# Altium PCB creative2017-李秋键.PcbDoc
Units mil, origin at the board's own origin, x right, y up, seen from the top; angles counter-clockwise.
Board outline 6000 x 4000 mil, 2 copper layers (Top Layer, Bottom Layer); 54 components, 95 nets, 310 pads, 81 vias.
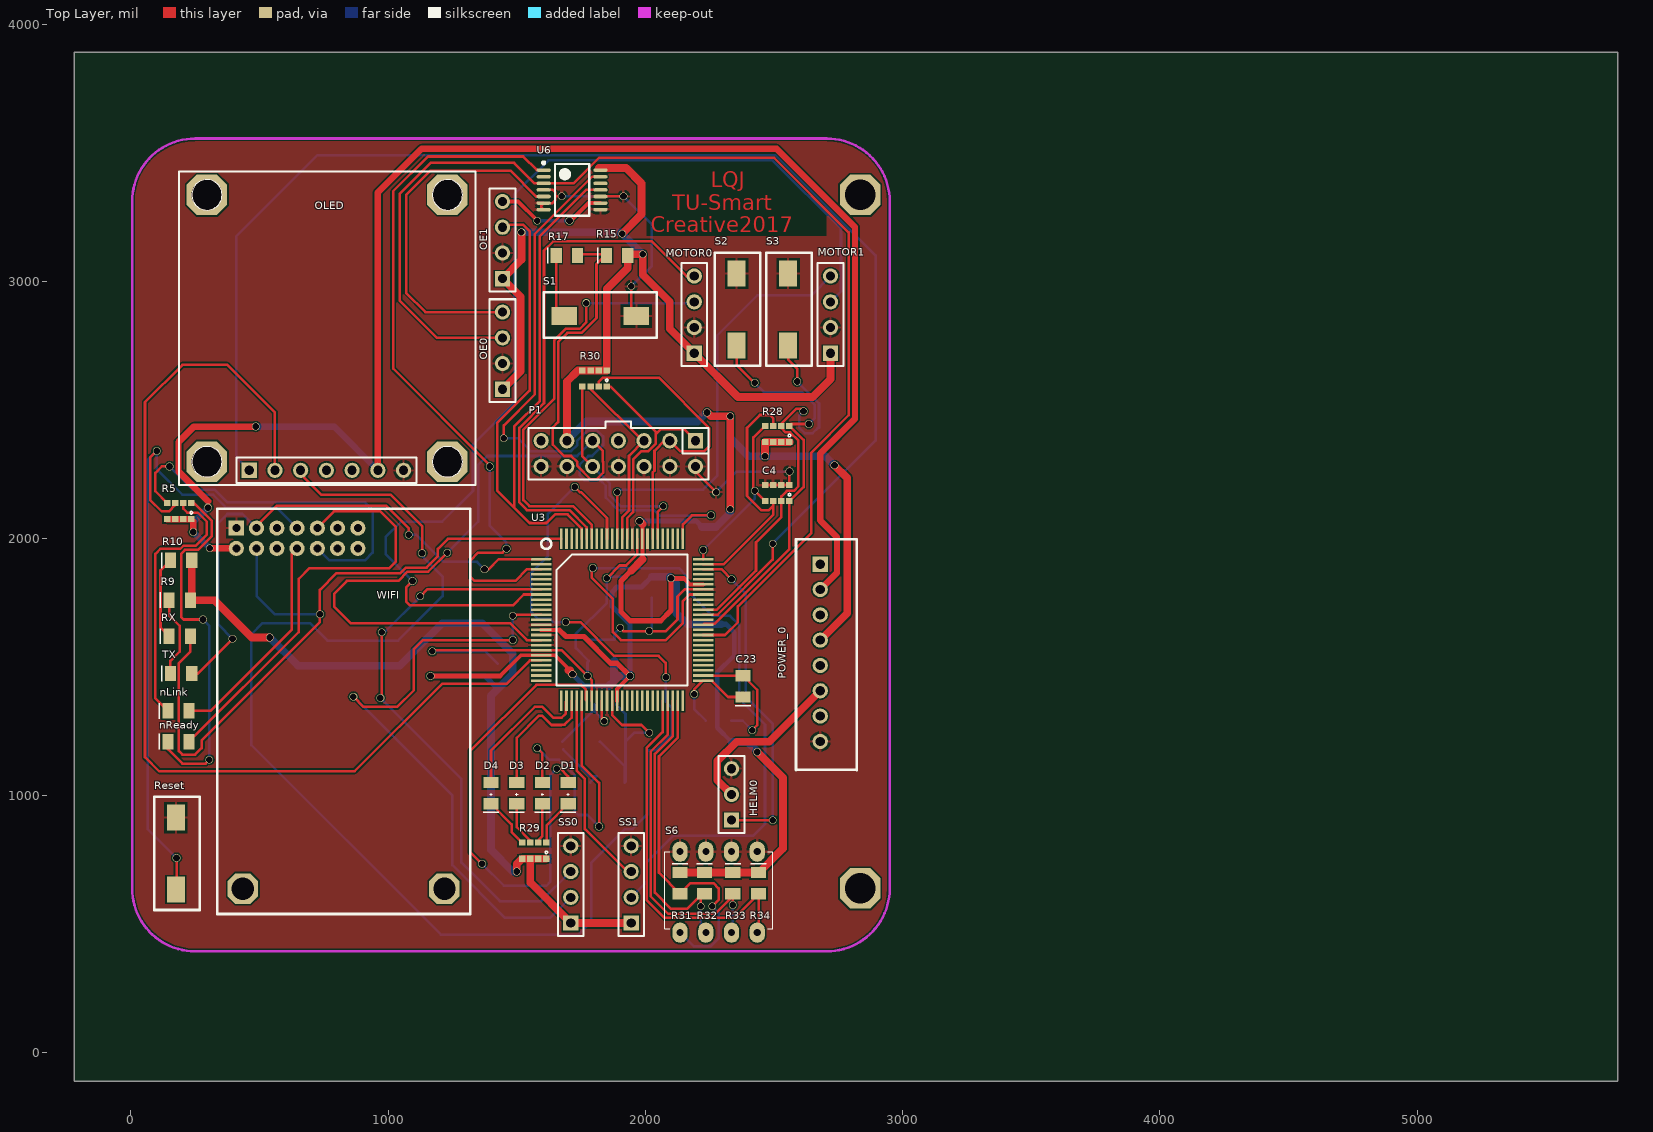
[diagram p0: Top Layer view]
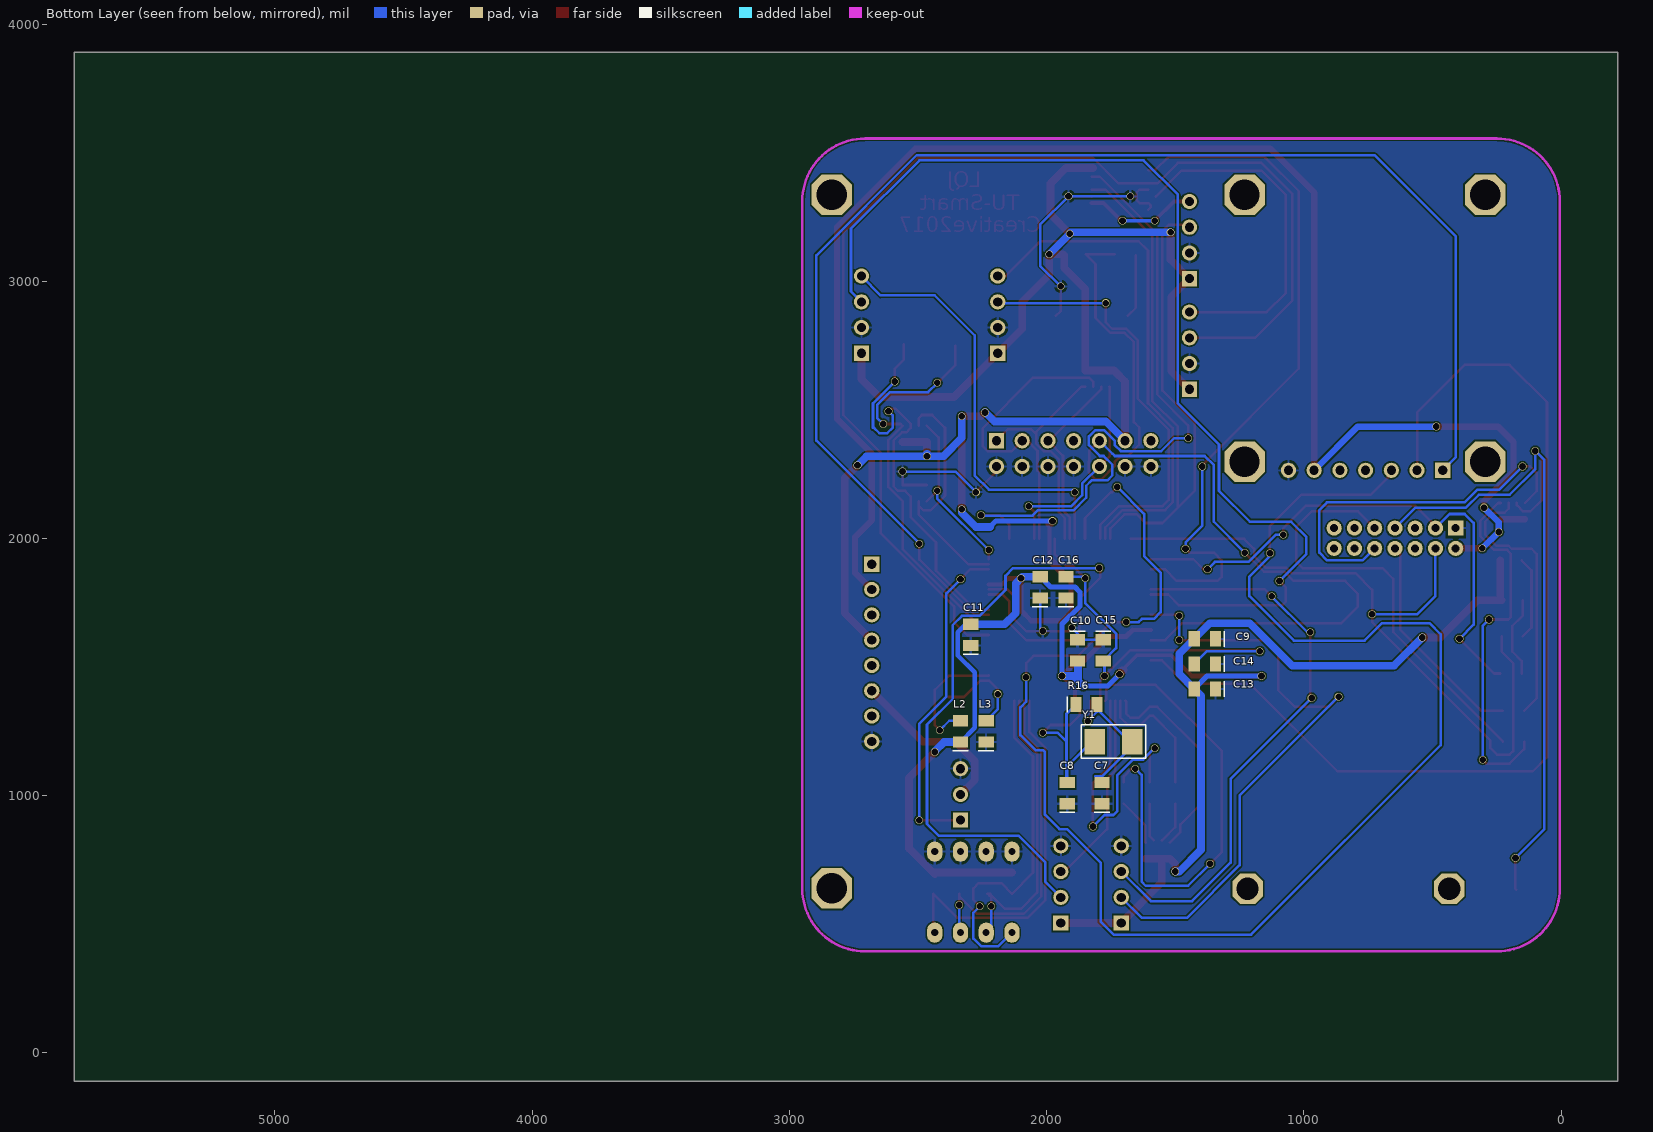
[diagram p1: Bottom Layer view, seen from below]

## Layer stack, top to bottom
Top Layer: signal copper 1.4
Dielectric: dielectric 12.6, FR-4, Dk 4.8
Bottom Layer: signal copper 1.4

## Board outline
-220,-110 5780,-110 5780,3890 -220,3890

## Design rules (kind name [scope] priority, off if disabled: settings)
Clearance [All] p1: gap=6
ComponentClearance [All] p1 off: gap=10 collisioncheckmode=3 verticalgap=10 showdistances=FALSE
HoleSize [All] p1: absolutevalues=TRUE maxlimit=200 minlimit=1 maxpercent=80.000 minpercent=20.000
MinimumSolderMaskSliver [All] p1: minsoldermaskwidth=1
PolygonConnect [All] p1: connectstyle=Relief reliefconductorwidth=10 reliefentries=4 polygonreliefangle="90 Angle" airgapwidth=10
RoutingVias [All] p1: holewidth=26 width=30 viastyle="Through Hole" minholewidth=26 minwidth=30 maxholewidth=26 maxwidth=30
SilkToSilkClearance [All] p1: silktosilkclearance=1
SilkToSolderMaskClearance [IsPad] p1: minsilkscreentomaskgap=0 clearancetoexposedcopper=TRUE
SolderMaskExpansion [All] p1: expansion=4
Width [All] p1: maxlimit=35 minlimit=10 preferedwidth=15
23 further rules are at their usual default settings.

## Classes and differential pairs
component class WiFi: nLink nReady R5 R9 R10 Reset RX TX WIFI
component class Total: C4 C7 C8 C9 C10 C11 C12 C13 C14 C15 C16 C23 D1 D2 D3 D4 HELM0 L2 L3 MOTOR0 MOTOR1 OE0 OE1 OLED P1 POWER_0 R15 R16 R17 R28 R29 R30 R31 R32 R33 R34 S1 S2 S3 S6 SS0 SS1 U3 U6 Y1

## Components (designator, comment, footprint, x,y, rotation, side; value= is the part's Value field where it differs from the comment)
C4 "Cap x4" 8P4R-0603 2560,2145 r180 top
C7 "Cap" "0805 2" 1785,1010 r90 bottom
C8 "Cap" "0805 2" 1920,1010 r90 bottom
C9 "Cap" "0805 2" 1385,1610 r0 bottom
C10 "Cap" "0805 2" 1880,1565 r270 bottom
C11 "Cap" "0805 2" 2295,1625 r90 bottom
C12 "Cap" "0805 2" 2025,1810 r90 bottom
C13 "Cap" "0805 2" 1385,1415 r0 bottom
C14 "Cap" "0805 2" 1385,1512.5 r0 bottom
C15 "Cap" "0805 2" 1780,1565 r270 bottom
C16 "Cap" "0805 2" 1925,1810 r90 bottom
C23 "Cap" "0805 2" 2380,1425 r90 top
D1 "LED" "0805 Pol 3" 1700,1010 r90 top
D2 "LED" "0805 Pol 3" 1600,1010 r90 top
D3 "LED" "0805 Pol 3" 1500,1010 r90 top
D4 "LED" "0805 Pol 3" 1400,1010 r90 top
HELM0 "Header 3" HDR1X3 2335,905 r90 top
L2 "Bead" "0805 2" 2335,1250 r90 bottom
L3 "Bead" "0805 2" 2235,1250 r90 bottom
MOTOR0 "Header 4" HDR1X4 2190,2720 r90 top
MOTOR1 "Header 4" HDR1X4 2720,2720 r90 top
nLink "LED" "0805 2" 185,1330 r0 top
nReady "LED" "0805 2" 185,1210 r0 top
OE0 "Header 4" HDR1X4 1445,2580 r90 top
OE1 "Header 4" HDR1X4 1445,3010 r90 top
OLED "Header 7X1" OLED-chiusir 1340,3430 r180 top
P1 "Header 7X2" "Header 2X7" 2195,2380 r180 top
POWER_0 "Header 8" XH2.54_8 2680,1900 r270 top
R5 "R x4" 8P4R-0603 235,2075 r180 top
R9 "Res" "0805 2" 190,1760 r0 top
R10 "Res" "0805 2" 195,1915 r0 top
R15 "Res" "0805 2" 1890,3100 r0 top
R16 "Res" "0805 2" 1845,1355 r180 bottom
R17 "Res" "0805 2" 1695,3100 r0 top
R28 "R x4" 8P4R-0603 2560,2375 r180 top
R29 "R x4" 8P4R-0603 1615,755 r180 top
R30 "R x4" 8P4R-0603 1850,2590 r180 top
R31 "Res2" "0805 2" 2135,660 r270 top
R32 "Res2" "0805 2" 2230,660 r270 top
R33 "Res2" "0805 2" 2340,660 r270 top
R34 "Res2" "0805 2" 2440,660 r270 top
Reset "Switch-1" 轻触按键 175,635 r90 top
RX "LED" "0805 2" 190,1620 r0 top
S1 "Switch-1" 轻触按键 1965,2865 r180 top
S2 "Switch-1" 轻触按键 2355,2750 r90 top
S3 "Switch-1" 轻触按键 2555,2750 r90 top
S6 "SW-DIP4" Switch_4 2285,625 r0 top
SS0 "Header 4" HDR1X4 1710,505 r90 top
SS1 "Header 4" HDR1X4 1945,505 r90 top
TX "LED" "0805 2" 195,1475 r0 top
U3 "MPC5604BFMLL" LQ_LQFP100 1595,1920 r0 top
U6 "CD4013B" TSOP-14 1715,3355 r0 top
WIFI "Header 7X2" USR-WIFI232-X 335,2115 r270 top
Y1 "XTAL" "5032 2" 1740,1210 r0 bottom

## Footprints (in the part's own frame and the unit in brackets; to place one, negate y for a bottom-side part, rotate by r counter-clockwise, add the part's x,y. Pads: shape width x height; smd on the part's side, far side on the other; paste and mask are expansions set on the pad)
8P4R-0603 [mm]
  rect 0.64x0.6 smd: 1(0,0) 2(0,-1.6) 3(0.8,0) 4(0.8,-1.6) 5(1.6,0) 6(1.6,-1.6) 7(2.4,0) 8(2.4,-1.6)
  silkscreen extent -0.13,-0.76 0.13,-0.51
"0805 2" [mm] "Chip Resistor; Body 2.0 x 1.3 mm (LxW typ)"
  rect 1.1x1.5 smd: 1(-1.05,0) 2(1.05,0)
  silkscreen extent -1.91,-0.76 -1.91,0.76
"0805 Pol 3" [mm] "Chip Resistor; Body 2.0 x 1.3 mm (LxW typ)"
  rect 1.1x1.5 smd: 1(-1.05,0) 2(1.055,0)
  silkscreen extent -1.91,-0.76 0,0.76
"5032 2" [mil]
  rect 80x100 smd: 1(-72.83,0) 2(72.83,0)
  silkscreen extent -125,-65 125,65
HDR1X3 [mm] "Connector; Header; 3 Position"
  rect 1.5x1.5 hole 0.9: 1(0,0)
  round 1.5 hole 0.9: 2(2.54,0) 3(5.08,0)
  silkscreen extent -1.27,-1.27 6.35,1.27
HDR1X4 [mm] "Connector; Header; 4 Position"
  rect 1.5x1.5 hole 0.9: 1(0,0)
  round 1.5 hole 0.9: 2(2.54,0) 3(5.08,0) 4(7.62,0)
  silkscreen extent -1.27,-1.27 8.89,1.27
"Header 2X7" [mm] "Connector; Header; 7x2 Position"
  rect 1.5x1.5 hole 0.9: 1(0,0)
  round 1.5 hole 0.9: 2(0,2.54) 3(2.54,0) 4(2.54,2.54) 5(5.08,0) 6(5.08,2.54) 7(7.62,0) 8(7.62,2.54) 9(10.16,0) 10(10.16,2.54) 11(12.7,0) 12(12.7,2.54) 13(15.24,0) 14(15.24,2.54)
  silkscreen extent -1.27,-1.9 16.51,3.81
LQ_LQFP100 [mm]
  oval 2x0.254 smd: 1(0,0)
  rect 2x0.254 smd: 2(0,-0.5) 3(0,-1) 4(0,-1.5) 5(0,-2) 6(0,-2.5) 7(0,-3) 8(0,-3.5) 9(0,-4) 10(0,-4.5) 11(0,-5) 12(0,-5.5) 13(0,-6) 14(0,-6.5) 15(0,-7) 16(0,-7.5) 17(0,-8) 18(0,-8.5) 19(0,-9) 20(0,-9.5) 21(0,-10) 22(0,-10.5) 23(0,-11) 24(0,-11.5) 25(0,-12) 51(16,-12) 52(16,-11.5) 53(16,-11) 54(16,-10.5) 55(16,-10) 56(16,-9.5) 57(16,-9) 58(16,-8.5) 59(16,-8) 60(16,-7.5) 61(16,-7) 62(16,-6.5) 63(16,-6) 64(16,-5.5) 65(16,-5) 66(16,-4.5) 67(16,-4) 68(16,-3.5) 69(16,-3) 70(16,-2.5) 71(16,-2) 72(16,-1.5) 73(16,-1) 74(16,-0.5) 75(16,0)
  rect 0.254x2 smd: 26(2,-14) 27(2.5,-14) 28(3,-14) 29(3.5,-14) 30(4,-14) 31(4.5,-14) 32(5,-14) 33(5.5,-14) 34(6,-14) 35(6.5,-14) 36(7,-14) 37(7.5,-14) 38(8,-14) 39(8.5,-14) 40(9,-14) 41(9.5,-14) 42(10,-14) 43(10.5,-14) 44(11,-14) 45(11.5,-14) 46(12,-14) 47(12.5,-14) 48(13,-14) 49(13.5,-14) 50(14,-14) 76(14,2) 77(13.5,2) 78(13,2) 79(12.5,2) 80(12,2) 81(11.5,2) 82(11,2) 83(10.5,2) 84(10,2) 85(9.5,2) 86(9,2) 87(8.5,2) 88(8,2) 89(7.5,2) 90(7,2) 91(6.5,2) 92(6,2) 93(5.5,2) 94(5,2) 95(4.5,2) 96(4,2) 97(3.5,2) 98(3,2) 99(2.5,2) 100(2,2)
  silkscreen extent 0,-12.46 14.46,2
OLED-chiusir [mm]
  oct 4x4 hole 3: 0(2.778,28.745) 0(2.778,2.395) 0(26.528,28.745) 0(26.528,2.395)
  rect 1.5x1.5 hole 0.9: 1(22.352,29.591)
  round 1.5 hole 0.9: 2(19.812,29.591) 3(17.272,29.591) 4(14.732,29.591) 5(12.192,29.591) 6(9.652,29.591) 7(7.112,29.591)
  silkscreen extent 0,0.08 29.3,31.06
Switch_4 [mm] "拨码开关"
  oval 1.5x2 hole 0.7: 1(-3.81,4) 2(-1.27,4) 3(1.27,4) 4(3.81,4) 5(3.81,-4) 6(1.27,-4) 7(-1.27,-4) 8(-3.81,-4)
  silkscreen extent -5.33,-3.62 5.33,4
TSOP-14 [mm] "TSOP, 14-Leads, Body 5.00x4.40mm, Pitch 0.65mm, IPC High Density"
  oval 1.4x0.35 smd: 1(-2.8,1.95) 2(-2.8,1.3) 3(-2.8,0.65) 4(-2.8,0) 5(-2.8,-0.65) 6(-2.8,-1.3) 7(-2.8,-1.95) 8(2.8,-1.95) 9(2.8,-1.3) 10(2.8,-0.65) 11(2.8,0) 12(2.8,0.65) 13(2.8,1.3) 14(2.8,1.95)
  silkscreen extent -2.92,-2.55 1.7,2.8
USR-WIFI232-X [mm]
  oct 3x3 hole 2.2: 0(37.5,22.45) 0(37.5,2.55)
  rect 1.5x1.5 hole 0.8: 1(1.9,1.9)
  round 1.5 hole 0.8: 2(3.9,1.9) 3(1.9,3.9) 4(3.9,3.9) 5(1.9,5.9) 6(3.9,5.9) 7(1.9,7.9) 8(3.9,7.9) 9(1.9,9.9) 10(3.9,9.9) 11(1.9,11.9) 12(3.9,11.9) 13(1.9,13.9) 14(3.9,13.9)
  silkscreen extent 0,0 40,25
XH2.54_8 [mm]
  rect 1.5x1.5 hole 0.9: 1(0,0)
  round 1.5 hole 0.9: 2(2.5,0) 3(5,0) 4(7.5,0) 5(10,0) 6(12.5,0) 7(15,0) 8(17.5,0)
  silkscreen extent -2.45,-2.4 20.32,3.6
轻触按键 [mil]
  rect 100x70 smd: 1(0,0) 2(280,0)
  silkscreen extent -79,-92 361,85

## Part data
C7 C8 C9 C10 C11 C12 C13 C14 C15 C16 C23: "Capacitor"
HELM0: "Header, 3-Pin"
MOTOR0 MOTOR1 OE0 OE1 SS0 SS1: "Header, 4-Pin"
OLED: library part OLED-chiusir
P1: "Header, 7-Pin, Dual row"
POWER_0: "Header, 8-Pin"
R5 R28 R29 R30: library part "Res x4"
R9 R10 R15 R16 R17 R31 R32 R33 R34: "Resistor"
S6: library part SWITCH-4
U6: "CMOS Dual 'D'-Type Flip-Flop"
WIFI: library part USR-WIFI232-X
Y1: "Crystal Oscillator"

## Free pads (board coordinates)
  oct 157.48x157.48 hole 118.11: 0(2835,640) 0(2835,3335.71)

## Via types
v1: diameter 30, hole 26, Top Layer to Bottom Layer, 81 vias

## Nets (pads, with @x,y where several pads share a name; then routed paths per layer and width w, separated by ;. In a path a pad name is that pad's centre, name@x,y a point inside that pad or via, vN(x,y) a via of type N, cw(c..) or ccw(c..) an arc to the next point about the centre after c; other vN are vias at no path point)
BAT_3.3(1): OLED.6 POWER_0.2 R5.1 R5.3 R5.5 R5.7 WIFI.2 | length 6257.5
  Top Layer w25: R5.7 R5.5 R5.3 R5.1 242.91,2067.09 v1(242.91,2025) ; 300,2145 185,2260 185,2375 245,2435 v1(485,2435) ; v1(306.46,1961.46) WIFI.2 ; OLED.6 960,3345 1130,3515 2510,3515 2815,3210 2815,2465 2680,2330 2680,2070 2745,2005 2745,1866.57 POWER_0.2
  Bottom Layer w25: v1(300,2120) 242.91,2062.91 v1(242.91,2025) v1(306.46,1961.46) ; v1(485,2435) 790,2435 OLED.6
BAT_3.3(2): POWER_0.3
BAT_5(1): C9.2 C10.2 C11.2 C12.2 C13.2 L2.1 MOTOR0.1 MOTOR1.1 OE0.1 OE1.1 P1.11 POWER_0.4 R9.2 R10.2 R15.2 R28.1 R28.3 R28.5 R28.7 R29.1 R29.3 R29.5 R29.7 R30.2 R30.4 R30.6 R30.8 R31.1 R32.1 R33.1 R34.1 SS0.1 SS1.1 U3.15 U3.20 U3.37 U3.70 U3.84 U6.14 | length 15052
  Top Layer w15: 1435,1465 1515.99,1545.99 U3.20 1649.01,1545.99 1707.5,1487.5
  Top Layer w16: U3.15 1665.59,1644.41 ; U3.37 1890.28,1415.28 v1(1940,1465) ; 1988.7,1918.7 U3.84 1988.7,2056.3 ; 2150,1845 2173.42,1821.58 U3.70
  Top Layer w20: v1(1165,1465) 1435,1465 ; 1665.59,1644.41 1691.31,1618.69 1761.31,1618.69 1865,1515 1890,1515 v1(1940,1465) ; 1945,1875 1905,1835 1905,1715 1940,1680 2060,1680 2100,1720 v1(2100,1845) 2150,1845
  Top Layer w30: R10.2 236.34,1765 R9.2 325,1760 470,1615 v1(540,1615) ; OE0.1 1515,2650 1515,2940 OE1.1 1518.13,3083.13 v1(1518.13,3190) ; v1(1500,705) 1500,734.49 R29.7 R29.5 ; R29.1 R29.3 R29.5 ; P1.11 1695,2610 1737.99,2652.99 R30.4 ; 1707.5,1487.5 1701.59,1487.5 v1(1716.59,1472.5) ; R30.6 R30.4 ; 1820,3440 1925,3440 1985,3380 1985,3260 v1(1910,3185) ; SS1.1 SS0.1 1552.01,662.99 R29.5 ; 1945,1875 1988.7,1918.7 ; v1(1977.5,2067.5) 1988.7,2056.3 ; R31.1 R32.1 R33.1 R34.1 ; v1(2240,2490) 2255,2475 v1(2330,2475) v1(2330,2114.09) ; R34.1@2435,695 2535,795 2535,1070 v1(2435,1170) ; v1@2465.51,2329.49 R28.7 R28.5 R28.3 R28.1 ; POWER_0.4 2785,1709.72 2785,2235 v1(2735,2285) ; MOTOR1.1 2720,2620 2650,2550 2360,2550 MOTOR0.1 2095,2815 2095,2920 1990,3025 v1(1990,3105) 1936.34,3105 R15.2 1931.34,3051.34 1850,2970 R30.2 R30.4
  Bottom Layer w18: C11.2@2313.66,1666.34 2345,1635 2345,1545 2280,1480 2280,1263.66 L2.1
  Bottom Layer w20: v1(1165,1465) 1376.34,1465 C13.2 ; v1(1716.59,1472.5) 1762.59,1426.5 1857.41,1426.5 ; v1(1940,1465) 1940,1667 1871,1736 1871,1792.34 1890,1811.34 1985,1811.34 C12.2 ; v1(1977.5,2067.5) 2197.5,2067.5 2220,2045 ; C11.2 C11.2@2313.66,1666.34
  Bottom Layer w30: v1(540,1615) 650,1505 1045,1505 1210,1670 1366.34,1670 C9.2 1485,1551.34 1485,1473.66 C13.2 1400,1388.66 1400,790 1485,705 v1(1500,705) ; v1(1518.13,3190) 1905,3190 v1(1990,3105) ; P1.11 1770,2455 2203,2455 v1@2240,2492 ; 1857.41,1426.5 1878.5,1447.59 ; C10.2 1878.5,1522.16 1878.5,1447.59 ; v1(1940,1465) 1895.91,1465 1878.5,1447.59 ; C12.2 v1@2093.66,1851.34 ; v1(2100,1845) 2120,1825 2120,1710 2163.66,1666.34 C11.2 ; 2220,2045 2275,2045 2330,2100 v1(2330,2114.09) ; v1(2330,2475) 2330,2391 2401,2320 v1@2475,2320 ; L2.1 2398.66,1208.66 v1@2432.32,1175 ; v1@2465.51,2329.49 v1@2475,2320 ; v1(2735,2285) 2700,2320 v1@2475,2320
  other v1: 2465,2320
BAT_5(2): POWER_0.5
BAT_6(1): HELM0.2 POWER_0.6 | length 665.8
  Top Layer w30: HELM0.2 2280,1060 2280,1135 2355,1210 2482.13,1210 POWER_0.6
BAT_6(2): POWER_0.7
BAT_7.2: POWER_0.1
EXTAL: C8.2 R16.1 U3.36 Y1.2 | length 853.1
  Top Layer w10: U3.36 1870.59,1314.41 1910,1275 1985,1275 v1(2015,1245)
  Bottom Layer w10: Y1.2@1822.83,1210 1920,1112.83 C8.2 1922.83,1054.17 1922.83,1210 ; R16.1 1922.83,1318.5 1922.83,1210 ; v1(2015,1245) 1957.83,1245 1922.83,1210
GND: C4.2 C4.4 C4.6 C4.8 C7.1 C8.1 C9.1 C10.1 C11.1 C12.1 C13.1 C14.1 C15.1 C16.1 HELM0.3 L3.1 MOTOR0.2 MOTOR1.2 OE0.2 OE1.2 OLED.7 P1.2 P1.4 P1.6 P1.8 P1.12 P1.14 POWER_0.8 Reset.2 S1.1 S2.2 S3.2 S6.1 S6.2 S6.3 S6.4 SS0.4 SS1.4 U3.14 U3.16 U3.18 U3.33 U3.35 U3.69 U3.83 U3.86 U6.4 U6.6 U6.7 U6.8 U6.10 WIFI.1 | length 2402
  Top Layer w10: U6.7 1595.95,3287.05 1595.95,3295 U6.6 1638.82,3303.82 1650,3315 1650,3330 ; U6.4 1640,3355 1650,3345 1650,3330 ; v1(1675,3330) 1650,3330 ; U6.10 1825.83,3330 v1(1915,3330) ; v1(1902.5,1652.5) 1915,1640 v1(2015,1640) 2080,1640 2125,1685 2125,1774 2152.89,1801.89 U3.69 ; v1(1945,2980) 1945,2885 S1.1 ; P1.2 2195,2260 v1(2275,2180) ; C4.8 C4.6 C4.4 C4.2 v1(2560,2260)
  Bottom Layer w10: v1(1675,3330) v1(1915,3330) 2025,3220 2025,3060 v1(1945,2980) ; C15.1 C10.1 1880,1630 v1(1902.5,1652.5) ; v1(2015,1640) 2025,1650 C12.1 ; v1(2275,2180) 2355,2260 v1(2560,2260)
MCU_RDY: P1.13
NetD1_1: D1.1 R29.2 | length 185.9
  Top Layer w10: R29.2 1616,818.99 1616,884.66 D1.1
NetD2_1: D2.1 R29.4 | length 149
  Top Layer w10: R29.4@1583.5,826.46 1600,842.96 D2.1
NetD3_1: D3.1 R29.6 | length 163.7
  Top Layer w10: D3.1 1500,878.47 R29.6@1552.01,826.46
NetD4_1: D4.1 R29.8 | length 200.6
  Top Layer w10: D4.1 1480,888.66 1480,858.5 R29.8
NetnLink_1: nLink.1 R5.4 | length 1045.5
  Top Layer w10: nLink.1 95,1378.66 95,1940 115,1960 191.97,1960 203.5,1971.53 251.53,1971.53 295,2015 295,2065 260,2100 220,2100 203.5,2116.5 R5.4
NetnLink_2: nLink.2 WIFI.8 | length 854.3
  Top Layer w10: nLink.2 310,1330 625,1645 625,1940.43 WIFI.8
NetnReady_1: nReady.1 R5.2 | length 1425
  Top Layer w10: nReady.1 143.66,1181.34 200,1125 290,1125 v1(305,1140) ; R5.2 244.64,2137.99 315,2067.63 315,2010 260.53,1955.53 210.13,1955.53 203.68,1949.08 203.68,1948.68 195,1940 195,1695 205,1685 v1(280,1685)
  Bottom Layer w10: v1(280,1685) 305,1660 v1(305,1140)
NetnReady_2: nReady.2 WIFI.9 | length 1706.4
  Top Layer w10: nReady.2 652.5,1636.16 652.5,1842.5 695,1885 1005,1885 1030,1910 1030,2045 970,2105 789.57,2105 WIFI.9
NetOE0_4: OE0.4 U6.5 | length 1372.7
  Top Layer w10: OE0.4 1145,2880 1070,2955 1070,3335 1165,3430 1475,3430 1575.59,3329.41
NetOE1_4: OE1.4 U6.9 | length 438.3
  Top Layer w15: OE1.4 1505,3310 v1(1580,3235) ; v1@1707.5,3232.5 1778.82,3303.82 U6.9
  Bottom Layer w15: v1(1580,3235) v1(1705,3235)
NetR5_6: R5.6 Reset.1 WIFI.7 | length 2813
  Top Layer w10: v1(100,2340) 75,2315 75,2150 120,2105 147.49,2105 172.01,2129.52 R5.6 ; Reset.1 177.5,637.5 v1(177.5,757.5)
  Bottom Layer w10: v1(177.5,757.5) 65,870 65,2305 v1(100,2340) 100,2270 200,2170 320,2170 370,2120 566.22,2120 WIFI.7
NetR5_8: R5.8 WIFI.10 | length 1473.5
  Top Layer w10: R5.8 95,2183.5 95,2255 120,2280 v1(150,2280)
  Bottom Layer w10: v1(150,2280) 240,2190 325,2190 375,2140 910,2140 940,2110 940,1945 910,1915 771.22,1915 WIFI.10
NetR9_1: R9.1 TX.1 | length 317.2
  Top Layer w10: R9.1 148.66,1701.34 190,1660 190,1560 153.66,1523.66 TX.1
NetR10_1: R10.1 RX.1 | length 325
  Top Layer w10: RX.1 115,1653.66 115,1876.34 R10.1
NetR17_1: R17.1 S1.2 | length 248
  Top Layer w10: R17.1 1653.66,2896.34 S1.2
PA0: SS0.2 U3.12 | length 2436.9
  Top Layer w10: v1(865,1385) 905,1345 1035,1345 1100,1410 1100,1570 1135,1605 v1(1485,1605) ; v1(1485,1700) 1488.47,1703.47 U3.12
  Bottom Layer w10: v1(865,1385) 1250,1000 1250,730 1455,525 1630,525 SS0.2 ; v1(1485,1605) v1(1485,1700)
PA1: SS0.3 U3.7 | length 2251.4
  Top Layer w10: v1(970,1380) 975,1385 v1(975,1635) ; v1(1125,1775) 1151.89,1801.89 U3.7
  Bottom Layer w10: v1(970,1380) 1285,1065 1285,740 1435,590 1595,590 SS0.3 ; v1(975,1635) 985,1635 v1(1125,1775)
PA3: SS1.2 U3.68 | length 2961.8
  Top Layer w10: v1(1795,1885) 1792,1882 1792,1847 1874,1765 1874,1636 1905,1605 2080,1605 2145,1670 2145,1755 2172.21,1782.21 U3.68
  Bottom Layer w10: v1(1795,1885) 2130,1885 2160,1855 2160,1800 2261.01,1698.99 2329.08,1698.99 2365,1663.08 2365,1375.91 2465,1275.91 2465,890 2420,845 2110,845 2005,740 2005,665 SS1.2
PA4: SS1.3 U3.29 | length 760.5
  Top Layer w10: U3.29 1732.8,1097.2 1765,1065 1765,870 1930,705 SS1.3
PA8: U3.72
PA9: HELM0.1 U3.73 | length 1288.9
  Top Layer w10: U3.73 2295.63,1880.63 v1(2335,1841.26) ; HELM0.1 v1(2495,905)
  Bottom Layer w10: v1(2335,1841.26) 2390,1786.26 2390,1385 2495,1280 v1(2495,905)
PA10: C4.5 R28.6 U3.74 | length 959
  Top Layer w10: U3.74 2305.32,1900.32 2497.01,2092.01 2497.01,2127.01 ; C4.5 2497.01,2127.01 ; R28.6 2497.01,2467.99 2485,2480 2445,2480 2395,2430 2395,2165 2450,2110 2480,2110 2497.01,2127.01
PA11: C4.7 R28.8 U3.75 | length 671
  Top Layer w10: U3.75 2225,1920.08 v1(2225,1955) ; v1@2420,2190.51 2420,2392.48 R28.8 ; v1(2425.51,2185) C4.7
  Bottom Layer w10: v1(2225,1955) 2425.51,2155.51 v1(2425.51,2185)
PA12: D1.2 U3.31 | length 1903.8
  Top Layer w10: v1(1365,735) 1320,780 1320,1175 1576,1431 1750.23,1431 1768.48,1412.75 1768.48,1372.51 U3.31 ; v1(1655,1105) 1670,1105 1700,1075 D1.2
  Bottom Layer w10: v1(1365,735) 1450,650 1615,650 1631,666 1631,1081 v1(1655,1105)
PA13: D2.2 U3.30 | length 1106.9
  Top Layer w10: v1(1580,1185) 1600,1165 D2.2 ; U3.30 1752.48,1117.52 1820,1050 v1(1820,880)
  Bottom Layer w10: v1(1580,1185) 1625,1140 1665,1140 1695,1110 1725,1080 1725,940 1740,925 1775,925 v1(1820,880)
PA14: D3.2 U3.28 | length 513.6
  Top Layer w10: D3.2 1500,1225 1585,1310 1600,1310 1635,1275 1674.09,1275 1675.09,1276 1686,1276 1713.11,1303.11 U3.28
PA15: D4.2 U3.27 | length 558.7
  Top Layer w10: D4.2 1400,1175 1570,1345 1600,1345 1641.29,1303.71 1675,1303.71 1689.74,1318.45 1689.74,1365.13 U3.27
PB0: U3.23
PB1: U3.24
PB2: RX.2 U3.100 WIFI.4 | length 2873.9
  Top Layer w10: RX.2 231.34,1560.02 186.32,1515 186.32,1173.68 200,1160 250,1160 275,1185 275,1215 735,1675 v1(735,1705) 735,1800 800,1865 1047.37,1865 1069.37,1887 1149.37,1887 1193.69,1931.31 1193.69,1959.6 1232.83,1998.74 U3.100
  Bottom Layer w10: WIFI.4 488.54,1776.46 560,1705 v1(735,1705)
PB3: TX.2 U3.1 WIFI.3 | length 2154.3
  Top Layer w10: TX.2 260,1475 v1(395,1610) ; WIFI.3 488.54,2048.54 567.5,2127.5 992.5,2127.5 1080,2040 v1(1080,2015) ; v1(1375,1880) 1390,1880 1430,1920 U3.1
  Bottom Layer w10: v1(395,1610) 340,1665 340,2060 375,2095 433.74,2095 WIFI.3 ; v1(1080,2015) 1109.09,2015 1215.09,1909 1346,1909 v1(1375,1880)
PB4: U3.50
PB5: U3.53
PB6: U3.54
PB7: U3.55
PB8: U3.39
PB9: U3.38
PB10: U3.40
PB11: U3.59
PB12: U3.61
PB13: U3.63
PB14: C4.3 R28.4 S3.1 U3.65 | length 1621.7
  Top Layer w10: U3.65 2278.15,1723.15 2430,1875 2430,1985 2528.5,2083.5 C4.3 2528.5,2163.5 2550.18,2185.18 2577.15,2185.18 2595,2203.03 2595,2379.97 2562.68,2412.28 2562.68,2412.68 2545.34,2412.68 2528.5,2429.52 R28.4 2528.5,2446.46 2587.04,2505 2615,2505 v1(2615,2495) ; S3.1@2555,2755 2555,2695 2590,2660 v1(2590,2610)
  Bottom Layer w10: v1(2590,2610) 2675,2525 2675,2430 2670.91,2430 2649.91,2409 2620.09,2409 2599,2430.09 2599,2479 v1(2615,2495)
PB15: U3.67
PC0: P1.1 R30.1 U3.87 | length 922.1
  Top Layer w10: R30.1 1865,2590 2040,2415 2040,2405 ; U3.87 1929.65,2079.39 1952.31,2102.06 1952.31,2306.79 1985,2339.47 2011.79,2339.47 2040,2367.69 2040,2405 ; P1.1 2150,2425 2060,2425 2040,2405
PC1: P1.3 R30.3 U3.82 | length 1206.1
  Top Layer w10: R30.3 1818.5,2608.69 1834.82,2625 2052.37,2625 2249,2428.37 2249,2359.39 2229.08,2339.47 2135.53,2339.47 P1.3 2074.94,2380 2035.53,2340.59 2035.53,2263.21 2028.07,2255.76 U3.82
PC2: OLED.5
PC5: OLED.3 U3.91 | length 6413
  Top Layer w10: OLED.3 660,2250 740.53,2169.47 1010.53,2169.47 1132,2048 v1(1132,1942) ; v1(1690,1675) 1747.37,1675 1878.37,1544 2051,1544 2079,1516 2079,1461 v1(2080,1460) ; v1(1725,2200) 1745,2180 1750,2180 1850.91,2079.09 U3.91
  Bottom Layer w10: v1(1132,1942) 1130,1940 1130,1933.54 1212,1851.54 1212,1775.83 1039.17,1603 763.46,1603 695.73,1670.73 511.73,1670.73 467.91,1626.91 467.91,1197.09 1205,460 1739.61,460 1790,510.39 1790,739.74 1920.44,870.19 1950.44,870.19 2007,926.75 2007,1170 2014,1177 2043.17,1177 2102,1235.83 2102,1343.25 2080,1365.25 v1(2080,1460) ; v1(1690,1675) 1642.63,1675 1630,1687.63 1582.63,1687.63 1557,1713.25 1557,1867 1621,1931 1621,2096 v1(1725,2200)
PC10: U3.22
PC11: OLED.2 U3.21 | length 3988.1
  Top Layer w10: OLED.2 560,2490 375,2675 200,2675 55,2530 55,1150 110,1095 870,1095 1210,1435 1460,1435 1551.3,1526.3 U3.21
PC12: U3.97
PC13: U3.98
PC14: U3.3 U6.1 | length 2758.7
  Top Layer w10: v1(1395,2280) 1395,2285 1020,2660 1020,3350 1155,3485 1525,3485 1578.23,3431.77 U6.1 ; v1(1460,1960) 1445,1945 1350,1945 1320,1915 1320,1850 1335,1835 1494.37,1835 1540,1880.63 U3.3
  Bottom Layer w10: v1(1395,2280) 1395,2050 1460,1985 v1(1460,1960)
PC15: U3.4
PD0: U3.41
PD1: U3.42
PD2: U3.43
PD3: U3.44
PD4: U3.45
PD5: R34.2 S6.5 U3.46 | length 1455.7
  Top Layer w10: U3.46 2067.44,1247.44 2005,1185 2005,595 2075,525 2346.34,525 R34.2 2440,472.52 S6.5
PD6: R33.2 S6.6 U3.47 | length 1324.8
  Top Layer w10: U3.47 2087.13,1237.13 2021,1171 2021,609 2089,541 2271,541 2340,610 R33.2 v1(2340,575)
  Bottom Layer w10: S6.6 2340,472.52 v1(2340,575)
PD7: R32.2 S6.7 U3.48 | length 1173.2
  Top Layer w10: U3.48 2106.81,1231.81 2037,1162 2037,623 2100,560 2161.34,560 2220,618.66 R32.2 ; v1(2215,570) 2215,603.66 R32.2@2222.5,611.16
  Bottom Layer w10: v1(2215,570) 2215,487.52 S6.7
PD8: R31.2 S6.8 U3.49 | length 1389.9
  Top Layer w10: U3.49 2126.5,1226.5 2053,1153 2053,700.66 R31.2 2176.34,660 2265,660 2285,640 2285,595 v1(2260,570)
  Bottom Layer w10: S6.8 2187.52,415 2255,415 2285,445 2285,545 v1(2260,570)
PD9: U3.56
PD10: U3.57
PD11: U3.58
PD12: OE0.3 U3.60 U6.3 | length 4713
  Top Layer w10: OE0.3 1190,2780 1045,2925 1045,3340 1165,3460 1490,3460 1569.41,3380.59 U6.3 1720.59,3380.59 1820,3480 2500,3480 2790,3190 2790,2479 2645,2334 2645,2021.31 2359.35,1735.65 2359.35,1674.35 2309.73,1624.73 U3.60
PD13: C4.1 R28.2 S2.1 U3.62 | length 1586.9
  Top Layer w10: U3.62 2228.6,1667.78 2268.85,1667.78 2560,1958.93 C4.1 2615,2200 2615,2382.99 R28.2 2567.01,2445 v1(2635,2445) ; S2.1 2355,2675 v1(2425,2605)
  Bottom Layer w10: v1(2425,2605) 2461.31,2568.69 2608.69,2568.69 2659,2518.37 2659,2469 v1(2635,2445)
PD14: OLED.1 U3.64 | length 5414.7
  Top Layer w10: U3.64 2281.09,1703.47 2495,1917.37 v1(2495,1980)
  Bottom Layer w10: OLED.1 410,2315 410,3175 725,3490 2505,3490 2895,3100 2895,2380 v1(2495,1980)
PE1: MOTOR1.3 U3.8 | length 4222.1
  Top Layer w10: v1(1095,1835) 1070,1810 1070,1755 1085,1740 1485,1740 1527.21,1782.21 U3.8
  Bottom Layer w10: v1(1095,1835) 990,1940 990,2005 1050,2065 1210,2065 1330,2185 1330,2365 1490,2525 1490,3336.77 1623.23,3470 2495,3470 2760.53,3204.47 2760.53,2960.53 MOTOR1.3
PE2: MOTOR1.4 U3.89 | length 1678.2
  Top Layer w10: U3.89 v1(1890.28,2180)
  Bottom Layer w10: v1(1890.28,2180) 1900,2189.72 2224.72,2189.72 2280,2245 2280,2790 2435,2945 2645,2945 MOTOR1.4
PE3: OLED.4
PE5: MOTOR0.3 U3.94 | length 1679.2
  Top Layer w10: v1(1770,2915) 1770,2840 1745,2815 1690,2815 1645,2770 1645,2542.37 1526,2423.37 1526,2149 1549,2126 1719,2126 1791.85,2053.15 U3.94
  Bottom Layer w10: v1(1770,2915) 1855,2915 MOTOR0.3@2190,2915
PE6: MOTOR0.4 U3.95 | length 2020.1
  Top Layer w10: U3.95 1772.17,2042.83 1705,2110 1540,2110 1510,2140 1510,2430 1606,2526 1606,3119.08 1641.92,3155 2025,3155 2160,3020 MOTOR0.4
PE7: OE1.3 U3.96 U6.11 | length 3044.7
  Top Layer w10: OE1.3 1455,3220 1525,3220 1550,3195 1550,2575 1424,2449 1424,2186 1490,2120 ; U3.96 1752.48,2038.98 1697.46,2094 1649,2094 1615,2060 1550,2060 1490,2120 ; U6.11 1770,3355 1590,3175 1590,2535 1490,2435 1490,2120
PE8: U3.9
PE9: U3.10
PE11: U3.13
PE12: U3.76 U6.13 | length 2630.2
  Top Layer w10: v1(1450,2390) 1450,2440 1570,2560 1570,3154.77 1570,3183.23 1792.95,3406.18 U6.13 ; U3.76 2146.18,2055 2181.18,2090 v1(2255,2090) v1@2254,2089
  Bottom Layer w10: v1(1450,2390) 1503.94,2390 1554.47,2339.47 1711.79,2339.47 1735.53,2363.21 1735.53,2380.53 1775.53,2420.53 1811.79,2420.53 1835.53,2396.79 1835.53,2362.69 1793.37,2320.53 1778.21,2320.53 1745,2287.31 1745,2245 1764,2226 1824.91,2226 1846,2204.91 1846,2159 1896,2109 2035.09,2109 2055.09,2089 v1@2254,2089
PH9: P1.5 R30.5 U3.88 | length 716.4
  Top Layer w10: R30.5 1787.01,2581.53 1988.54,2380 P1.5 1936.31,2321.31 1936.31,2108.69 1909.96,2082.33 U3.88
PH10: P1.10 R30.7 U3.81 | length 828.3
  Top Layer w10: R30.7 1754.47,2588.96 1754.47,2320.53 P1.10 ; U3.81 2047.76,2102.76 v1(2070,2125)
  Bottom Layer w10: P1.10 1862,2213 1862,2168 1905,2125 v1(2070,2125)
R\E\S\E\T\: P1.9 R15.1 R17.2 U3.17 | length 3672
  Top Layer w10: v1(1230,1945) 1156,1871 1076,1871 1040,1835 840,1835 790,1785 790,1735 855,1670 1475,1670 1539.96,1605.04 U3.17 ; R17.2@1736.34,3105 1848.66,3105 1810,3066.34 1810,2857.37 1751.63,2799 1696.63,2799 1661,2763.37 1661,2452.37 1640,2431.37 1640,2365 1684.47,2320.53 1711.79,2320.53 1735.53,2296.79 1735.53,2282.16 1787.69,2230 1810,2230 1835.53,2255.53 1835.53,2297.31 1835,2297.84 1835,2340 P1.9
  Bottom Layer w10: v1(1230,1945) 1350,2065 1350,2285 1385.53,2320.53 1735.06,2320.53 1744.53,2330 1745,2330 P1.9
VDD_HV_ADC: C23.2 L2.2 U3.52 | length 492.9
  Top Layer w10: U3.52 2225.83,1466.34 C23.2 2435,1411.34 2435,1275 v1(2415,1255)
  Bottom Layer w10: L2.2 2378.66,1291.34 v1(2415,1255)
VDD_LV: C14.2 C15.2 C16.2 U3.19 U3.32 U3.85 | length 1763.1
  Top Layer w10: v1(1171.99,1561.99) 1175.67,1565.67 U3.19 1674.33,1565.67 v1(1775,1465) 1791.85,1448.15 U3.32 ; v1(1850,1845) 1900,1895 1925,1895 1969.02,1939.02 U3.85
  Bottom Layer w10: v1(1171.99,1561.99) 1376.85,1561.99 C14.2 ; v1(1775,1465) 1775,1518.66 C15.2 1730,1573.66 1730,1630 1850,1750 v1(1850,1845) ; v1@1856.34,1851.34 C16.2
VSS_HV_ADC: C23.1 L3.2 U3.51 | length 370.9
  Top Layer w10: v1(2190,1395) 2190,1412.64 U3.51 2257.44,1447.56 2321.34,1383.66 C23.1
  Bottom Layer w10: v1(2190,1395) 2190,1336.34 L3.2
XTAL: C7.2 R16.2 U3.34 Y1.1 | length 539.2
  Top Layer w10: U3.34 1831.22,1300 v1@1840.32,1290.3
  Bottom Layer w10: Y1.1@1677.17,1210 1803.66,1336.5 R16.2 ; Y1.1@1680,1180 1783.66,1076.34 1810,1076.34 C7.2 ; R16.2@1803.66,1326.34 v1(1840,1290)
pads on no net: OLED.0 P1.7 U3.2 U3.5 U3.6 U3.11 U3.25 U3.26 U3.66 U3.71 U3.77 U3.78 U3.79 U3.80 U3.90 U3.92 U3.93 U3.99 U6.2 U6.12 WIFI.0 WIFI.5 WIFI.6 WIFI.11 WIFI.12 WIFI.13 WIFI.14

## Polygon pours and split planes (outlines as drawn)
GND on Top Layer "Top Layer-No Net" (solid, remove dead copper, pour order 10): -220,-110 5780,-110 5780,3890 -220,3890
GND on Bottom Layer "Top Layer-No Net1" (solid, remove dead copper, pour order 12): -220,-110 5780,-110 5780,3890 -220,3890

## Keep-outs
Keep-Out Layer:
  lines w10: 2950,639.93 cw(c2705.07,639.93) 2705,395 249.86,395.07 cw(c249.93,640) 5,640 5,3310 cw(c249.93,3310) 249.86,3554.93 2705,3555 cw(c2705.07,3310.07) 2950,3310.07 2950,640

## Other copper
Top Layer:
  text "LQJ" at 2255,3365 h60
  text "TU-Smart" at 2105,3275 h60
  text "Creative2017" at 2020,3190 h60